# Altium PCB ps2-blueretro.PcbDoc
Units mm, origin at the board's own origin, x right, y up, seen from the top; angles counter-clockwise.
Board outline 92.5 x 75 mm, 2 copper layers (Top Layer, Bottom Layer); 40 components, 27 nets, 132 pads, 0 vias.
Unrouted connection lines stored in the file: 86.
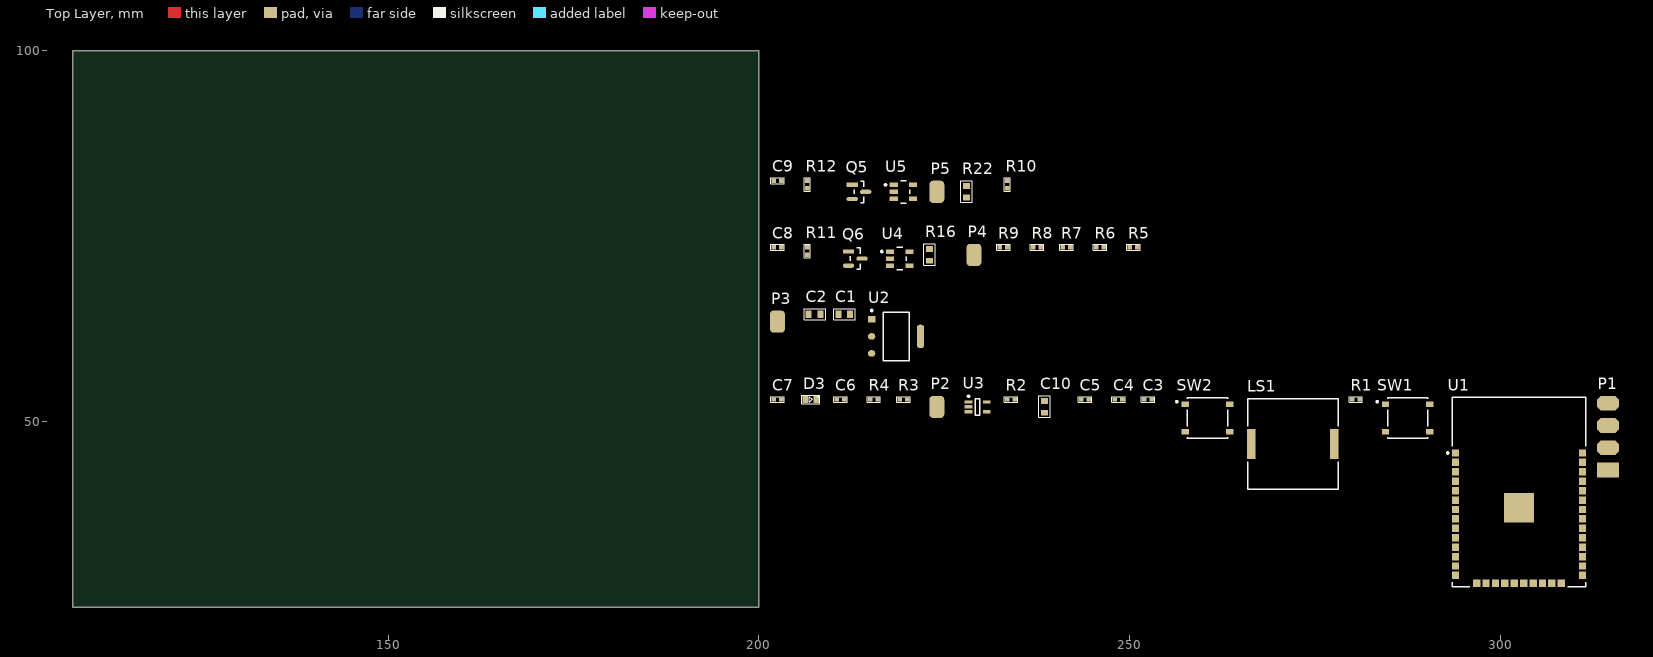
[diagram p0: Top Layer view]
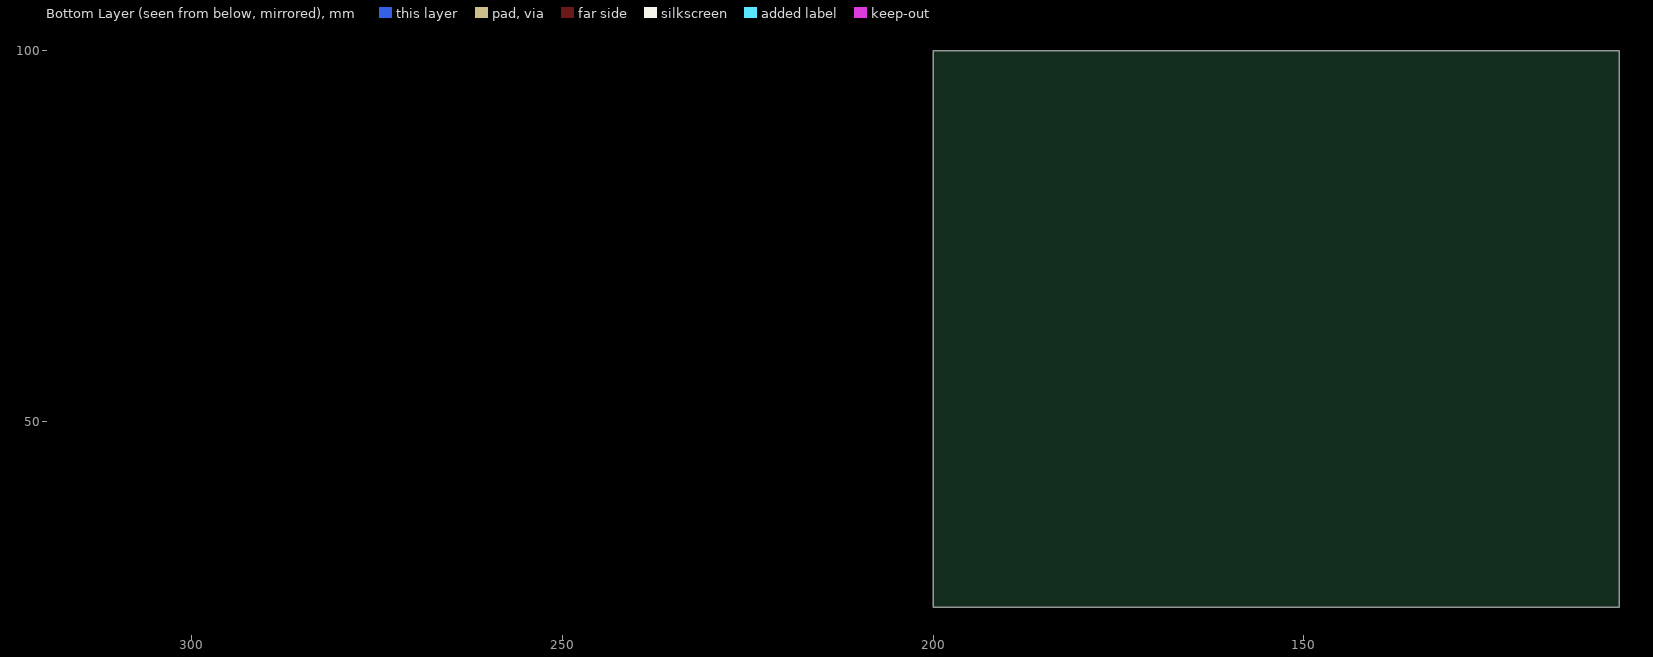
[diagram p1: Bottom Layer view, seen from below]

## Layer stack, top to bottom
Top Solder: solder mask 0.0102, Solder Resist, Dk 3.5
Top Layer: signal copper 0.0356
Dielectric 1: dielectric 0.32, FR-4, Dk 4.8
Bottom Layer: signal copper 0.0356
Bottom Solder: solder mask 0.0102, Solder Resist, Dk 3.5

## Board outline
107.5,25 200,25 200,100 107.5,100

## Design rules (kind name [scope] priority, off if disabled: settings)
Clearance [All] p1: gap=0.254 ignorepadtopadclearanceinfootprint=FALSE except(0: Arc-Hole Track-Hole SMDPad-Hole THPad-Hole Via-Hole Fill-Hole Poly-Hole Region-Hole Text-Hole)
DiffPairsRouting DiffPairsRouting_1 [All] p1 off: maxlimit=0.5 minlimit=0.15 mostfreqgap=0.2 toplayer_minwidth=0.2 toplayer_maxwidth=0.2 toplayer_prefwidth=0.2 bottomlayer_minwidth=0.2 bottomlayer_maxwidth=0.2 bottomlayer_prefwidth=0.2 maxuncoupledlength=12.7
DiffPairsRouting USB_DATA [InDifferentialPair('USB_DATA')] p2: maxlimit=0.5 minlimit=0.15 mostfreqgap=0.2 toplayer_minwidth=0.2 toplayer_maxwidth=0.2 toplayer_prefwidth=0.2 bottomlayer_minwidth=0.2 bottomlayer_maxwidth=0.2 bottomlayer_prefwidth=0.2 maxuncoupledlength=12.7
MatchedLengths [InDifferentialPair('USB_DATA')] p1: tolerance=0.051 checknetsindiffpair=TRUE checkdiffpairvsdiffpair=FALSE checkxsignals=FALSE checkothers=FALSE
PolygonConnect [All] p1: connectstyle=Relief reliefconductorwidth=0.254 reliefentries=4 polygonreliefangle="90 Angle" airgapwidth=0.254
RoomDefinition U_02-PSU-ps2-blueretro [InComponentClass('U_02-PSU-ps2-blueretro')] p1: confinementstyle=ConfineIn formatcopy=TRUE lockcomponents=FALSE outline 177.5,60 222.5,60 222.5,75 177.5,75
RoomDefinition U_03-CTRL1-ps2-blueretro [InComponentClass('U_03-CTRL1-ps2-blueretro')] p2: confinementstyle=ConfineIn formatcopy=TRUE lockcomponents=FALSE outline 179,27.5 197,27.5 197,35 179,35
RoomDefinition U_04-CTRL2-ps2-blueretro [InComponentClass('U_04-CTRL2-ps2-blueretro')] p3: confinementstyle=ConfineIn formatcopy=TRUE lockcomponents=FALSE outline 0,0 205.1,0 205.1,145.6 0,145.6
RoutingVias [All] p1: holewidth=0.3 width=0.7 viastyle="Through Hole" minholewidth=0.3 minwidth=0.7 maxholewidth=0.45 maxwidth=1.27
SolderMaskExpansion [All] p1: expansion=0.102 istentingtop=FALSE
Width [All] p1: maxlimit=1 minlimit=0.2 preferedwidth=0.2
29 further rules are at their usual default settings.

## Classes and differential pairs
component class U_04-CTRL2-ps2-blueretro: C9 P5 Q5 R10 R12 R22 U5
component class U_03-CTRL1-ps2-blueretro: C8 P4 Q6 R5 R6 R7 R8 R9 R11 R16 U4
component class U_02-PSU-ps2-blueretro: C1 C2 P3 U2
component class U_01-ESP32-ps2-blueretro: C3 C4 C5 C6 C7 C10 D3 LS1 P1 P2 R1 R2 R3 R4 SW1 SW2 U1 U3

## Components (designator, comment, footprint, x,y, rotation, side; value= is the part's Value field where it differs from the comment)
C1 "cap_0603" cap_0603 211.5,64.5 r0 top value=22uF/10V
C2 "cap_0603" cap_0603 207.5,64.5 r0 top value=22uF/10V
C3 "cap_0402" res_0402 252.499,53 r0 top value=100nF
C4 "cap_0402" res_0402 248.5,53 r0 top value=100nF
C5 "cap_0402" res_0402 244,53 r0 top value=100nF
C6 "cap_0402" res_0402 211,53 r0 top value=100nF
C7 "cap_0402" res_0402 202.5,53 r0 top value=1uF
C8 "cap_0402" res_0402 202.5,73.5 r0 top value=100nF
C9 "cap_0402" res_0402 202.5,82.5 r0 top value=100nF
C10 "cap_0603" cap_0603 238.5,52 r90 top value=22uF
D3 "led_0603" led0603_GREEN 207,53 r0 top value=Green
LS1 "PKLCS1212E4001-R1" FP-PKLCS1212E4001-R1-MFG 271.999,47 r0 top
P1 "UART_SOLDER_CON" UART_SOLDER_CON 314.499,43.5 r90 top
P2 "Solder_Contact_2mm" SINGLE_SOLDER_CON 224,52 r0 top
P3 "Solder_Contact_2mm" SINGLE_SOLDER_CON 202.5,63.5 r0 top
P4 "Solder_Contact_2mm" SINGLE_SOLDER_CON 229,72.5 r0 top
P5 "Solder_Contact_2mm" SINGLE_SOLDER_CON 224,81 r0 top
Q5 "BSS138" FP-318-08-IPC_B 213.5,81 r0 top
Q6 "BSS138" FP-318-08-IPC_B 213,72 r0 top
R1 "res_0402" res_0402 280.499,53 r0 top value=10k
R2 "res_0402" res_0402 234,53 r0 top value=10k
R3 "res_0402" res_0402 219.5,53 r0 top value=1k
R4 "res_0402" res_0402 215.5,53 r0 top value=1k
R5 "res_0402" res_0402 250.499,73.5 r0 top value=33R
R6 "res_0402" res_0402 246,73.5 r0 top value=33R
R7 "res_0402" res_0402 241.5,73.5 r0 top value=33R
R8 "res_0402" res_0402 237.5,73.5 r0 top value=33R
R9 "res_0402" res_0402 233,73.5 r0 top value=33R
R10 "res_0402" res_0402 233.5,82 r90 top value=33R
R11 "res_0402" res_0402 206.5,73 r90 top value=1R
R12 "res_0402" res_0402 206.5,82 r90 top value=1R
R16 "res_0603" res_0603 223,72.5 r90 top value=100k
R22 "res_0603" res_0603 228,81 r90 top value=100k
SW1 "PTS526SK15SMTR2LFS" FP-PTS526SK15SMTR2LFS-MFG 287.499,50.5 r0 top
SW2 "PTS526SK15SMTR2LFS" FP-PTS526SK15SMTR2LFS-MFG 260.499,50.5 r0 top
U1 "ESP-WROOM-32" OLMX-ESP-WROOM-32 302.499,37 r0 top
U2 "AMS1117-3.3" FP-AMS1117-IPC_C 218.5,61.5 r0 top
U3 "SN74LVC1G125DCKR" DCK0005A_M 229.5,52 r0 top
U4 "INA180A4IDBVT" FP-DBV0005A-MFG 219,72 r0 top
U5 "INA180A4IDBVT" FP-DBV0005A-MFG 219.5,81 r0 top

## Footprints (in the part's own frame and the unit in brackets; to place one, negate y for a bottom-side part, rotate by r counter-clockwise, add the part's x,y. Pads: shape width x height; smd on the part's side, far side on the other; paste and mask are expansions set on the pad)
cap_0603 [mm]
  rect 0.8x0.965 smd: 1(-0.787,0) 2(0.788,0)
  silkscreen extent -1.4,-0.76 1.52,0.76, body extent -0.8,-0.38 0.8,0.42, height 0.8
DCK0005A_M [mm] "SOT23, 5-Leads, Body 2.15x1.4mm, Pitch 0.65mm, IPC Low Density"
  rrect22% 1.05x0.45 smd: 1(-1.225,0.65) 2(-1.225,0) 3(-1.225,-0.65) 4(1.225,-0.65) 5(1.225,0.65)
  silkscreen extent -1.35,-1.1 0.3,1.55, body extent -1.14,-1 1.14,1, height 0.94
FP-318-08-IPC_B [mm]
  rect 1.524x0.578 smd paste+0 mask+0: 1(-0.91,0.95)
  rrect100% 1.524x0.578 smd paste+0 mask+0: 2(-0.91,-0.95) 3(0.91,0)
  silkscreen extent -0.65,-1.45 0.65,1.45, body extent -1.92,-1.7 1.92,1.7, height 0.25
FP-AMS1117-IPC_C [mm]
  rect 1.004x0.872 smd paste+0 mask+0: 1(-3.295,2.29)
  rrect100% 1.004x0.872 smd paste+0 mask+0: 2(-3.295,0) 3(-3.295,-2.29)
  rrect87% 1.004x3.182 smd paste+0 mask+0: 4(3.295,0)
  silkscreen extent -3.42,-3.25 1.75,3.62, body extent -3.9,-3.35 3.9,3.35, height 0.25
FP-DBV0005A-MFG [mm]
  rrect17% 1.1x0.6 smd paste+0 mask+0: 1(-1.3,0.95) 2(-1.3,0) 3(-1.3,-0.95) 4(1.3,-0.95) 5(1.3,0.95)
  silkscreen extent -2.55,-1.53 0.87,1.52, body extent -1.95,-1.78 1.95,1.78, height 0.25
FP-PKLCS1212E4001-R1-MFG [mm]
  rect 1.2x4 smd paste+0 mask+0: 1(5.6,0) 2(-5.6,0)
  silkscreen extent -6.1,-6.1 6.1,6.1, body extent -6.3,-6.2 6.3,6.2, height 0.25
FP-PTS526SK15SMTR2LFS-MFG [mm]
  rect 1x0.7 smd paste+0 mask+0: 1(-3,1.85) 2(3,1.85) 3(-3,-1.85) 4(3,-1.85)
  silkscreen extent -4.25,-2.7 2.7,2.7, body extent -3.6,-2.8 3.6,2.8, height 0.25
led0603_GREEN [mm] "LED Green, 2-Leads, Body 1.6x0.8mm"
  rect 0.7x0.9 smd: 1(-0.75,0) 2(0.75,0)
  silkscreen extent -1.2,-0.55 1.2,0.55, body extent -0.81,-0.4 0.81,0.4, height 0.6
OLMX-ESP-WROOM-32 [mm] "SMD, 38-Leads, Body 18x25.5mm, Pitch 1.27mm"
  rect 0.95x1 smd: 1(-8.575,8.78) 2(-8.575,7.51) 3(-8.575,6.24) 4(-8.575,4.97) 5(-8.575,3.7) 6(-8.575,2.43) 7(-8.575,1.16) 8(-8.575,-0.11) 9(-8.575,-1.38) 10(-8.575,-2.65) 11(-8.575,-3.92) 12(-8.575,-5.19) 13(-8.575,-6.46) 14(-8.575,-7.73) 17(-3.175,-8.78) 25(8.575,-7.73) 26(8.575,-6.46) 27(8.575,-5.19) 28(8.575,-3.92) 29(8.575,-2.65) 30(8.575,-1.38) 31(8.575,-0.11) 32(8.575,1.16) 33(8.575,2.43) 34(8.575,3.7) 35(8.575,4.97) 36(8.575,6.24) 37(8.575,7.51) 38(8.575,8.78)
  rect 4x4 smd: 1(0,1.395)
  rect 1x0.95 smd: 15(-5.715,-8.78) 16(-4.445,-8.78) 18(-1.905,-8.78) 19(-0.635,-8.78) 20(0.635,-8.78) 21(1.905,-8.78) 22(3.175,-8.78) 23(4.445,-8.78) 24(5.715,-8.78)
  silkscreen extent -9.72,-9.23 9,16.27, body extent -9.04,-9.25 9.04,16.29, height 3.04
res_0402 [mm]
  rect 0.6x0.6 smd: 1(-0.5,0) 2(0.5,0)
  silkscreen extent -0.9,-0.4 0.9,0.4, body extent -0.5,-0.25 0.5,0.25, height 0.35
res_0603 [mm]
  rect 0.8x0.965 smd: 1(-0.787,0) 2(0.788,0)
  silkscreen extent -1.4,-0.76 1.52,0.76, body extent -1.3,-0.67 1.3,0.67, height 0.47
SINGLE_SOLDER_CON [mm]
  rrect50% 2x3 smd: 1(0,0)
UART_SOLDER_CON [mm]
  rect 2x3 smd: 1(0,0)
  oct 2x3 smd: 2(3,0) 3(6,0) 4(9,0)

## Part data
D3: "Green 3,2V 20mA", Manufacturer="Würth Elektronik", Manufacturer Part Number=150060GS75000, Supplier Part Number=732-4971-1-ND, ComponentLink1Description="Supplier Link", ComponentLink1URL=https://www.digikey.at/de/products/detail/w%C3%BCrth-elektronik/150060GS75000/4489898, ComponentLink2Description="Manufacturer Link", ComponentLink3Description="Datasheet Link", ComponentLink3URL=https://www.we-online.com/components/products/datasheet/150060GS75000.pdf, Price=0,14, Supplier=Digikey
LS1: library part CMP-2000-05277-2, "AUDIO PIEZO TRANSDUCER 25V SMD", Frequency=4kHz, Max Operating Temperature=70°C, Max Supply Voltage=25V, Min Operating Temperature=-20°C, Nominal Input Voltage=3V, Package Quantity=1, Depth=12mm, Diameter=12mm, Height=3mm, Lead Free="Lead Free", Length=12mm, Max Frequency=4kHz, Mount="Surface Mount", Packaging="Tape and Reel", Radiation Hardening=No, REACH SVHC="No SVHC", Self Resonant Frequency=4kHz, Termination=Solder, Voltage Rating=25V, Voltage Rating (DC)=25V, Washable=No, Width=12mm
Q5 Q6: library part CMP-07173-000101-1, "MOSFET N-CH 50V 220MA SOT-23", Case/Package=SOT-23, Continuous Drain Current (ID)=220mA, Drain to Source Breakdown Voltage=50V, Drain to Source Resistance=3.5R, Gate to Source Voltage (Vgs)=20V, Input Capacitance=27pF, Max Operating Temperature=150°C, Max Power Dissipation=360mW, Min Operating Temperature=-55°C, On-State Resistance=6R, Package Quantity=1, Threshold Voltage=1.3V, Contact Plating=Tin, Current Rating=220mA, Drain to Source Voltage (Vdss)=50V, Dual Supply Voltage=50V, Element Configuration=Single, Fall Time=9ns, Height=0.93mm, Lead Free="Lead Free", Length=2.92mm, Mount="Surface Mount", Nominal Vgs=1.3V, Number of Elements=1, Number of Pins=3, Packaging="Tape and Reel", Power Dissipation=360mW, Radiation Hardening=No, Rds On Max=3.5R, REACH SVHC="No SVHC", Rise Time=9ns, Termination=SMD/SMT, Turn-Off Delay Time=20ns, Turn-On Delay Time=2.5ns, Voltage Rating (DC)=50V, Weight=0.03g, Width=1.3mm
SW1 SW2: library part CMP-10040-000013-1, "TACT 5.2 X 5.2, 1.5 MM H, 260GF,", Contact Current Rating=50mA, Contact Resistance=100mΩ, Manufacturer=C&K, Operating Force=250gf, Temperature="-20°C to +70°C", Temperature Range High=+70°C, Temperature Range Low=-20°C, Voltage Rating Dc=12V, Automotive=No, Category=Switch, ComponentLink2Description=Datasheet, ComponentLink2URL=https://www.ckswitches.com/media/2780/pts526.pdf, Device Class L1=Electromechanical, Device Class L2=Switches, Device Class L3="Tactile Switches", Digikey Description="TACT 5.2 X 5.2, 1.5 MM H, 260GF,", Electromechanical Life=200000Cycles, Height=1.65mm, Lead Free=Yes, Manufacturer Part Number=PTS526SK15SMTR2LFS, Octopart=https://octopart.com/pts526+sk15+smtr2+lfs-c%26k+components-100617999, Package=PTS526SK15SMTR2LFS, RoHS=TRUE, Standoff Height=0mm, Throw Configuration=SPST-NO
U1: library part CMP-2000-07454-1, "Espressif System, 2.7 to 3.6 V, -40 to 85 degC, 38-Pin SMD", Manufacturer=Olimex, Package Description="38-Pin Surface Mount Device, Body 18 x 25.5 mm, Pitch 1.27 mm", Datasheet URL=http://www.espressif.com/sites/default/files/documentation/esp-wroom-32_datasheet_en.pdf, Datasheet Version="Rev. 2.1, 09/2017", Manufacturer URL=https://www.olimex.com, Mounting Technology=SurfaceMount, Package Reference=ESP-WROOM-32, RoHSCompliant=false
U2: library part CMP-209535-000001-1, "LDO Voltage Regulators 1A, 3.3V", Dropout Voltage=1.1V, Manufacturer="Advanced Monolithic Systems", Max Junction Temp=+125°C, Max Power Dissipation=1.2W, Max Supply Voltage=15V, Nominal Supply Current=5mA, Output Current=1A, Output Voltage=3.3V, Package=AMS1117, Temperature="-40°C to +125°C", Temperature Range Low=-40°C, Automotive=No, Category=IC, ComponentLink2Description=Datasheet, ComponentLink2URL=http://www.advanced-monolithic.com/pdf/ds1117.pdf, Device Class L1="Integrated Circuits (ICs)", Device Class L2="Power Management ICs", Device Class L3="Voltage Regulators - Linear", Height=1.8mm, Ipc Land Pattern Name=SOT229P700X180-4, Lead Free=Yes, Manufacturer Part Number=AMS1117-3.3, Number Of Outputs=1, Octopart=https://octopart.com/ams1117-3.3-advanced+monolithic+systems-25899300, Output Type=Fixed, RoHS=TRUE, Standoff Height=0.64mm, Temperature Range High=+125°C
U3: library part CMP-0859-00281-3, "Single Bus Buffer Gate With 3-State Outputs, DCK0005A, LARGE T&R", F @ Nom Voltage(Max)(Mhz)=150, Generic Part Number=SN74LVC1G125, ICC @ Nom Voltage(Max)(mA)=0.01, Manufacturer="Texas Instruments", Operating Temperature Range(C)="-40 to 125,-40 to 85", Rating=Catalog, tpd @ Nom Voltage(Max)(ns)=9,5.5,4.5,4, Voltage(Nom)(V)=1.8,2.5,3.3,5, 3-State Output=Yes, Bits(#)=1, DatasheetVersion=SCES223T, Input Type=CMOS/TTL, Logic=True, Output Drive (IOL/IOH)(Max)(mA)=32/-32, Output Type=CMOS, PackageReference=DCK0005A, Schmitt Trigger=No, Sub-Family="Non-Inverting Buffer/Driver", Technology Family=LVC, VCC(Max)(V)=5.5, VCC(Min)(V)=1.65
U4 U5: library part CMP-04895-000007-1, "IC CURR SENSE 1 CIRCUIT SOT23-5", Ambient Temperature Range High=+125°C, Ambient Temperature Range Low=-40°C, Input Bias Current=80uA, Input Offset Voltage=0.1mV, Manufacturer="Texas Instruments", Max Junction Temp=+150°C, Max Supply Voltage=5.5V, Min Supply Voltage=2.7V, Nominal Supply Current=197uA, Output Current Per Channel=8mA, Package=DBV0005A, Temperature="-40°C to +125°C", Voltage Gain=0.2V/mV, Automotive=No, Bandwidth=105kHz, Category=IC, ComponentLink2Description=Datasheet, ComponentLink2URL=http://www.ti.com/lit/ds/symlink/ina180.pdf, Device Class L1="Integrated Circuits (ICs)", Device Class L2="Linear ICs", Device Class L3=Instrumentation, Digikey Description="IC CURR SENSE 1 CIRCUIT SOT23-5", Height=1.45mm, Ipc Land Pattern Name=SOT95P280X145-5, Lead Free=Yes, Manufacturer Part Number=INA180A4IDBVT, Number Of Channels=1, Octopart=https://octopart.com/ina180a4idbvt-texas+instruments-81856280, RoHS=TRUE, Standoff Height=0mm, Temperature Range High=+125°C, Temperature Range Low=-40°C

## Nets (pads, with @x,y where several pads share a name; then routed paths per layer and width w, separated by ;. In a path a pad name is that pad's centre, name@x,y a point inside that pad or via, vN(x,y) a via of type N, cw(c..) or ccw(c..) an arc to the next point about the centre after c; other vN are vias at no path point)
+3V3: C1.2 C5.2 C6.2 C7.2 C8.1 C9.1 C10.2 R1.2 R2.2 R3.2 R16.2 R22.2 U1.2 U2.2 U2.4 U3.5 U4.5 U5.5
+3V3_PORT1: R11.1 R12.1 U1.5 U4.3 U5.3
+3V3_PORT1_OUT: P4.1 R11.2 U4.4
+3V3_PORT2_OUT: P5.1 R12.2 U5.4
+8V5_SYSTEM: C2.2 P3.1 U2.3
Boot: SW1.3 SW1.4 U1.25 U3.4
EN: C3.1 R1.1 SW2.1 U1.3
GND: C1.1 C2.1 C3.2 C4.2 C5.1 C6.1 C7.1 C8.2 C9.2 C10.1 D3.2 LS1.2 P1.1 Q5.2 Q6.2 SW1.1 SW1.2 SW2.3 SW2.4 U1.1 U1.15 U1.38 U2.1 U3.3 U4.2 U5.2
IO14: P2.1 U1.13 U3.2
IO16: R2.1 U1.27 U3.1
IO17: R4.1 U1.28
IO18: LS1.1 U1.30
IO22: R5.1 U1.31 U1.36
IO23: U1.37
IO25: R9.1 U1.10 U1.33
IO26: R8.1 U1.9 U1.11
IO27: R6.1 U1.8 U1.12
NetC4_1: C4.1 SW2.2
NetD3_1: D3.1 R3.1 R4.2
NetQ5_1: Q5.1 U5.1
NetQ5_3: Q5.3 R22.1 U1.4
NetQ6_1: Q6.1 U4.1
NetQ6_3: Q6.3 R16.1 U1.7
NetR7_1: R7.1 U1.6
NetR10_1: R10.1 U1.29
RXD0: P1.3 U1.34
TXD0: P1.4 U1.35
pads on no net: P1.2 R5.2 R6.2 R7.2 R8.2 R9.2 R10.2 U1.14 U1.16 U1.17 U1.18 U1.19 U1.20 U1.21 U1.22 U1.23 U1.24 U1.26 U1.32